# Altium PCB STM8S_RF433_RELAY_LEARN_CODE_V1.PcbDoc
Units mil, origin at the board's own origin, x right, y up, seen from the top; angles counter-clockwise.
Board outline 2490.35 x 1506.09 mil, 2 copper layers (Top Layer, Bottom Layer); 25 components, 20 nets, 83 pads, 2 vias.
Unrouted connection lines stored in the file: 2.
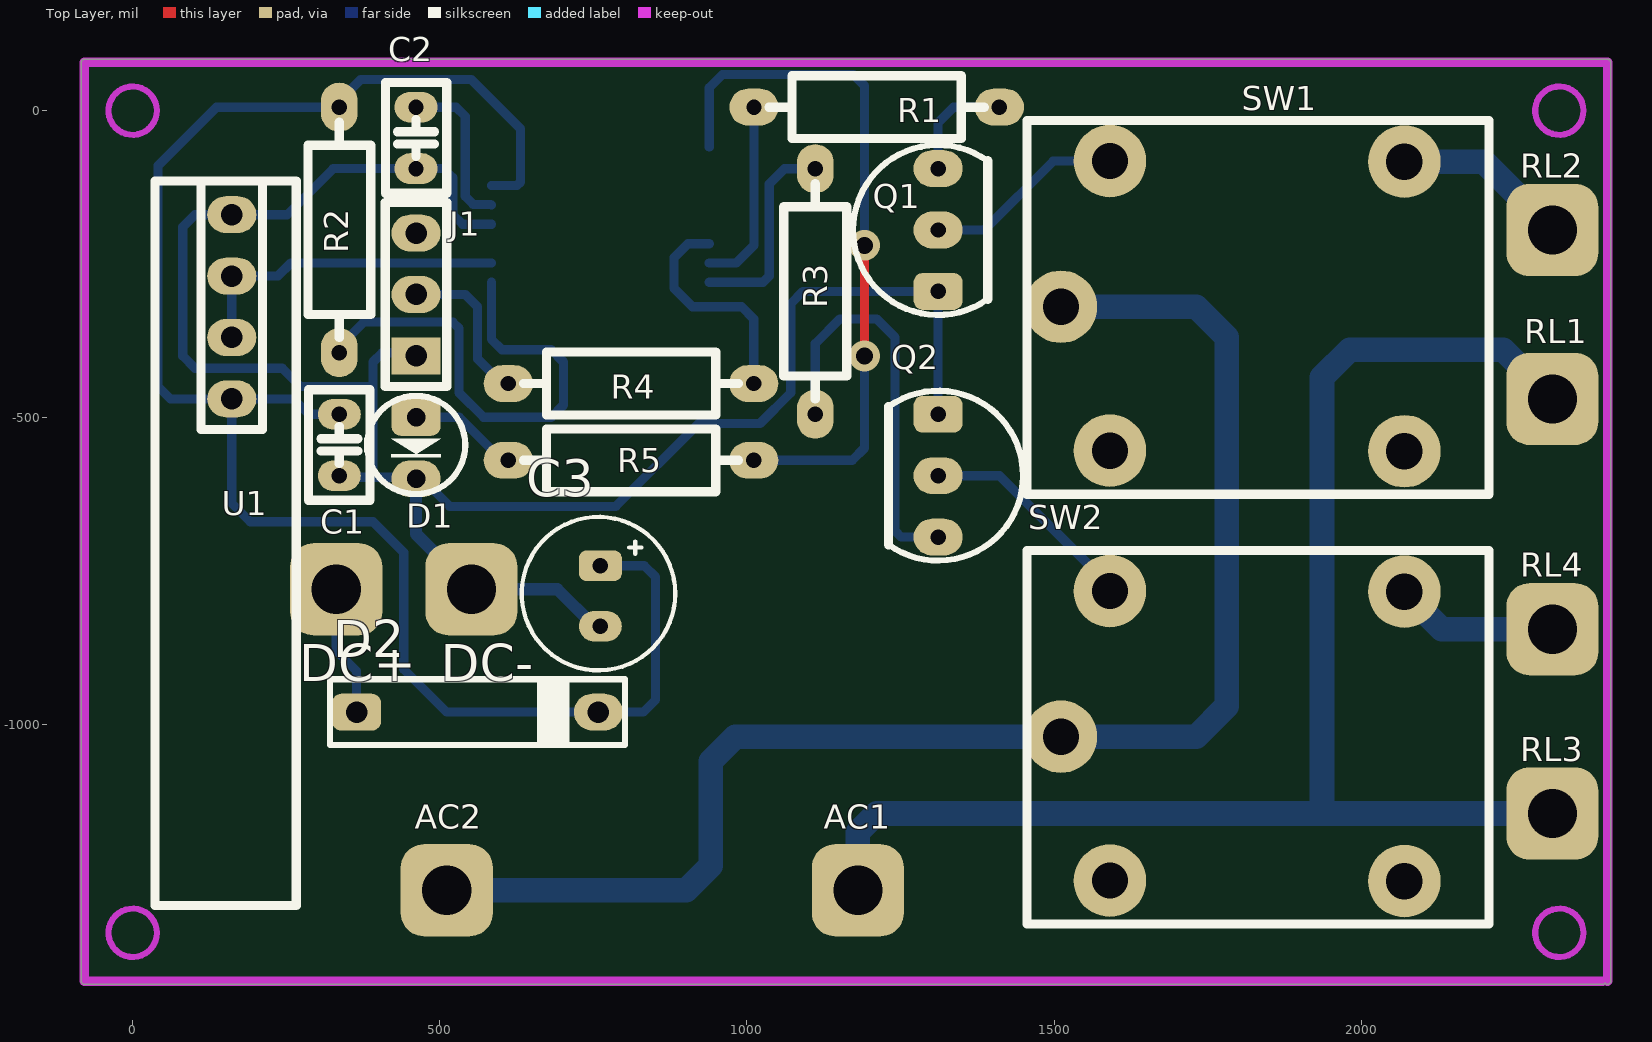
[diagram p0: Top Layer view]
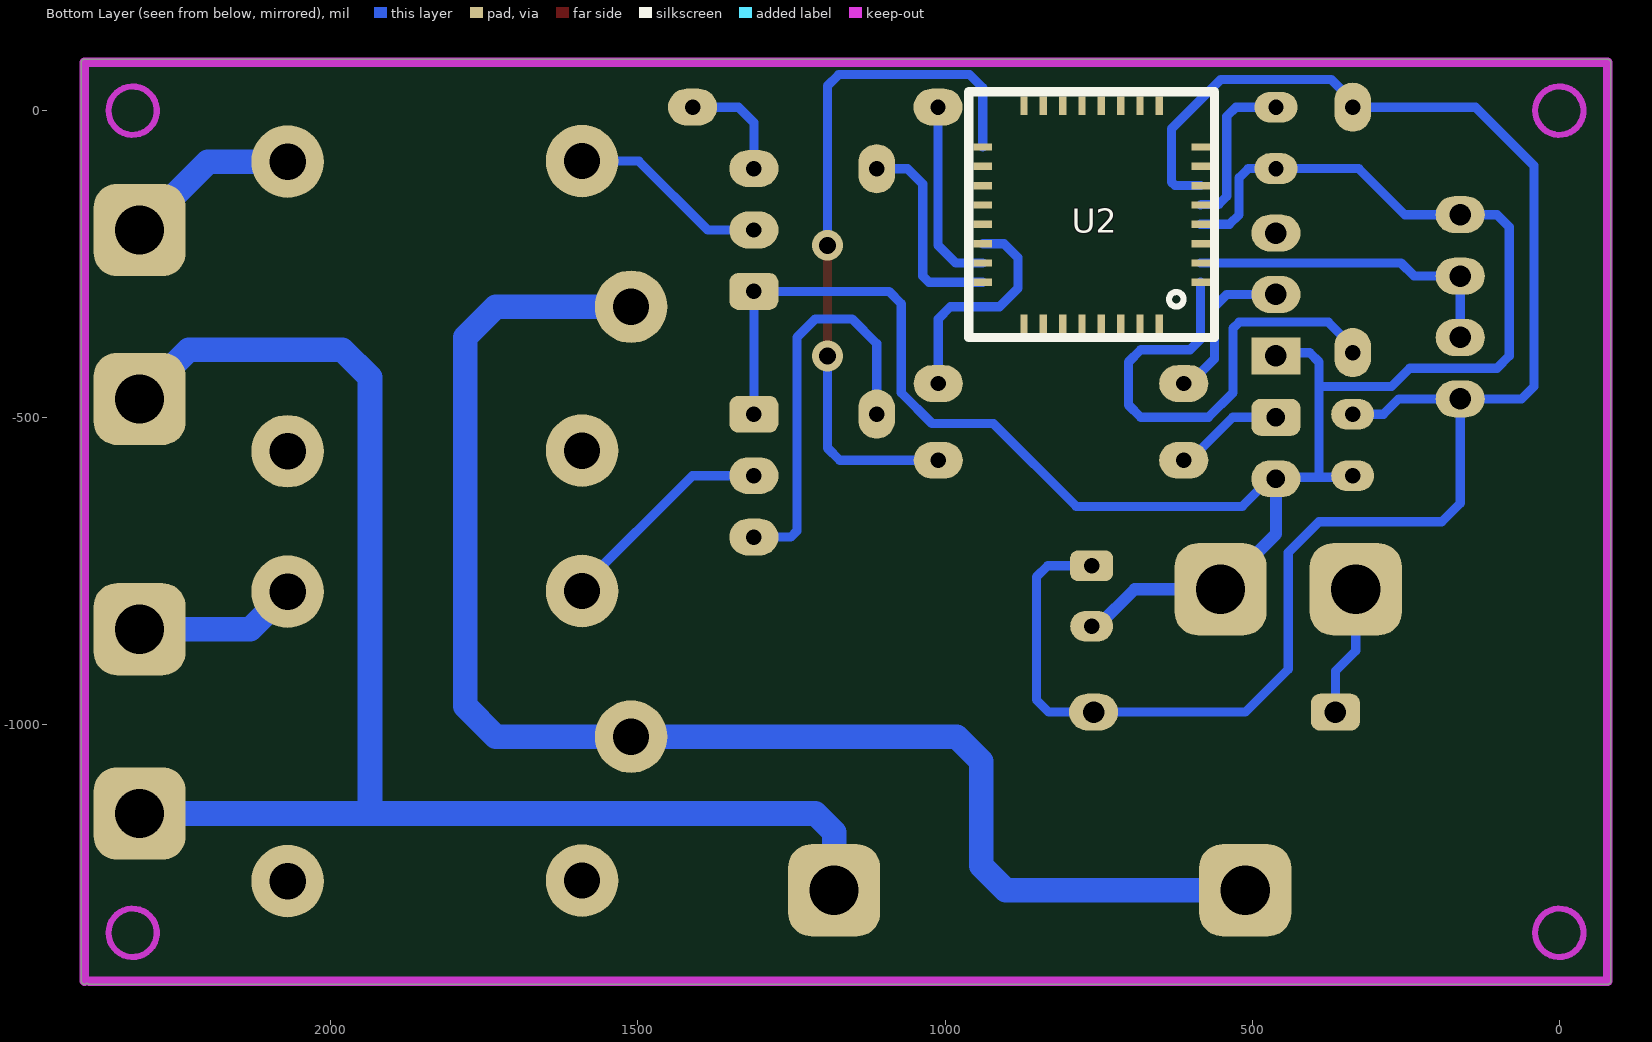
[diagram p1: Bottom Layer view, seen from below]

## Layer stack, top to bottom
Top Solder: solder mask 0.4, Solder Resist, Dk 3.5
Top Layer: signal copper 1.4
Dielectric 1: dielectric 12.6, FR-4, Dk 4.8
Bottom Layer: signal copper 1.4
Bottom Solder: solder mask 0.4, Solder Resist, Dk 3.5

## Board outline
-83.92,-1417.49 ccw(c-78.91,-1417.49) -78.91,-1422.5 2393.22,-1422.5 ccw(c2393.22,-1417.49) 2397.24,-1420.49 ccw(c2401.25,-1417.49) 2404.88,-1420.95 ccw(c2401.41,-1417.33) 2406.42,-1417.33 2406.42,78.57 ccw(c2401.41,78.57) 2400.43,83.49 ccw(c2399.44,78.57) 2399.44,83.59 -78.91,83.59 ccw(c-78.91,78.57) -83.92,78.57

## Design rules (kind name [scope] priority, off if disabled: settings)
Clearance [All] p1: gap=3.94 ignorepadtopadclearanceinfootprint=FALSE
PolygonConnect [All] p1: connectstyle=Relief reliefconductorwidth=10 reliefentries=4 polygonreliefangle="90 Angle" airgapwidth=10
RoutingVias [All] p1: holewidth=28 width=50 viastyle="Through Hole" minholewidth=28 minwidth=50 maxholewidth=28 maxwidth=50
SolderMaskExpansion [All] p1: expansion=4 istentingtop=FALSE
Width [All] p1: maxlimit=50 minlimit=10 preferedwidth=20
30 further rules are at their usual default settings.

## Components (designator, comment, footprint, x,y, rotation, side; value= is the part's Value field where it differs from the comment)
AC1 "SolderPoint" SolderPoint 1180.54,-1269.46 r0 top
AC2 "SolderPoint" SolderPoint 511.25,-1269.46 r0 top
C1 "100pF" CAP_Ceramic_Disc_2 336.25,-544.46 r270 top
C2 "100pF" CAP_Ceramic_Disc_2 461.25,-44.46 r90 top
C3 "100uF" CAP_RAD_2.5mm 758.3,-786.5 r270 top
D1 "LED" LED_3MM_GREEN 461.25,-544.46 r270 top
D2 "1N4937" DO-41 561.25,-979.46 r0 top
DC+ "SolderPoint" SolderPoint 331.25,-779.46 r0 top
DC- "SolderPoint" SolderPoint 551.25,-779.46 r0 top
J1 "UPDATE_CODE" "Header 3x1 TH Pitch 2.54mm" 461.25,-299.46 r90 top
Q1 "2SC1815" TO-92 1311.25,-194.46 r90 top
Q2 "2SC1815" TO-92 1311.25,-594.46 r270 top
R1 "10k" RES-0.25W-H-MF 1211.25,5.54 r0 top
R2 "10k" RES-0.25W-H-MF 336.25,-194.26 r90 top
R3 "10k" RES-0.25W-H-MF 1111.25,-294.46 r270 top
R4 "10k" RES-0.25W-H-MF 811.25,-444.46 r180 top
R5 "10k" RES-0.25W-H-MF 811.25,-569.46 r0 top
RL1 "AC" SolderPoint 2311.25,-469.46 r270 top
RL2 "AC" SolderPoint 2311.25,-194.46 r270 top
RL3 "AC" SolderPoint 2311.25,-1144.46 r0 top
RL4 "AC" SolderPoint 2311.25,-844.46 r0 top
SW1 "RELAY_10A" RELAY_10A_5PIN 1836.06,-314.54 r0 top
SW2 "RELAY_10A" RELAY_10A_5PIN 1836.06,-1014.54 r0 top
U1 "RF433_315_RECEVICE" RF433_315_RECEVICE 161.25,-669.46 r90 top
U2 "STM8S103K3T6" LQFP032_FPT-32P-M21 761.25,-169.46 r0 bottom

## Footprints (in the part's own frame and the unit in brackets; to place one, negate y for a bottom-side part, rotate by r counter-clockwise, add the part's x,y. Pads: shape width x height; smd on the part's side, far side on the other; paste and mask are expansions set on the pad)
CAP_Ceramic_Disc_2 [mil]
  oval 50x70 hole 25: 1(-50,0) 2(50,0)
  silkscreen extent -90,-50 90,50, body extent -92,-49 92,49, height 289
CAP_RAD_2.5mm [mm]
  rrect50% 1.27x1.778 hole 0.635: 1(-1.155,0.075)
  oval 1.27x1.778 hole 0.635: 2(1.345,0.075)
  silkscreen extent -3.17,-3.17 3.17,3.17, body extent -3.07,-3.07 3.23,3.23, height 11.02
DO-41 [mil]
  rrect50% 80x60 hole 35: 1(-196.85,0)
  oval 80x60 hole 35: 2(196.85,0)
  silkscreen extent -240,-54 240,54, body extent -214,-54 214,54, height 132
"Header 3x1 TH Pitch 2.54mm" [mil]
  rect 60x80 hole 35: 1(-100,0)
  oval 60x80 hole 35: 2(0,0) 3(100,0)
  silkscreen extent -150,-50 150,50, body extent -150,-50 150,50, height 350
LED_3MM_GREEN [mil]
  rrect50% 60x80 hole 30: 1(-45,0)
  oval 60x80 hole 30: 2(55,0)
  silkscreen extent -80,-80 80,80, body extent -70,-75 65,75, height 223
LQFP032_FPT-32P-M21 [mil]
  rect 30x12 smd: 1(-177.32,110.24) 2(-177.32,78.74) 3(-177.32,47.24) 4(-177.32,15.75) 5(-177.32,-15.75) 6(-177.32,-47.24) 7(-177.32,-78.74) 8(-177.32,-110.24) 17(177.32,-110.24) 18(177.32,-78.74) 19(177.32,-47.24) 20(177.32,-15.75) 21(177.32,15.75) 22(177.32,47.24) 23(177.32,78.74) 24(177.32,110.24)
  rect 12x30 smd: 9(-110.24,-177.32) 10(-78.74,-177.32) 11(-47.24,-177.32) 12(-15.75,-177.32) 13(15.75,-177.32) 14(47.24,-177.32) 15(78.74,-177.32) 16(110.24,-177.32) 25(110.24,177.32) 26(78.74,177.32) 27(47.24,177.32) 28(15.75,177.32) 29(-15.75,177.32) 30(-47.24,177.32) 31(-78.74,177.32) 32(-110.24,177.32)
  silkscreen extent -200,-200 200,200, body extent -177,-177 177,177, height 59
RELAY_10A_5PIN [mm]
  round 3 hole 1.5: 1(-6.225,5.9) 2(-8.25,-0.125) 3(-6.225,-6.075) 4(5.95,-6.1) 5(5.95,5.875)
  silkscreen extent -9.65,-7.88 9.45,7.57, body extent -9.65,-7.88 9.45,7.62, height 15.3
RES-0.25W-H-MF [mil]
  oval 80x60 hole 25: 1(-199.8,0) 2(199.8,0.01)
  silkscreen extent -175,-51 175,51, body extent -211,-51 211,51, height 106
RF433_315_RECEVICE [mil]
  oval 60x80 hole 35: 1(200,0) 2(300,0) 3(400,0) 4(500,0)
  silkscreen extent -625,-105 555,125, body extent -626,-105 555,167, height 472
SolderPoint [mil]
  rrect50% 150x150 hole 80: 1(0,0)
TO-92 [mil]
  rrect50% 60x80 hole 25: 1(-100,0)
  oval 60x80 hole 25: 2(0,0) 3(100,0)
  silkscreen extent -138,-81 138,138, body extent -109,-48 109,93, height 298

## Part data
C1 C2: library part Capacitors(Disc)
C3: library part Capacitor(Radian)
D1: library part "LED 3MM"
J1: library part "Header 3x1 TH Pitch 2.54mm"
Q1 Q2: library part "2SC1815 (TO-92)"
R1 R2 R3 R4 R5: library part "Resistors THD"
RL1 RL2 RL3 RL4: library part SolderPoint
U1: library part RF433_315

## Via types
v1: diameter 50, hole 28, Top Layer to Bottom Layer, 2 vias

## Nets (pads, with @x,y where several pads share a name; then routed paths per layer and width w, separated by ;. In a path a pad name is that pad's centre, name@x,y a point inside that pad or via, vN(x,y) a via of type N, cw(c..) or ccw(c..) an arc to the next point about the centre after c; other vN are vias at no path point)
GND: C1.2 C2.1 C3.2 D1.2 DC-.1 J1.1 Q1.1 Q2.1 U1.4 U2.4 | length 3347.6
  Bottom Layer w15: C1.2 338.75,-596.96 386.25,-596.96 ; J1.1@461.25,-394.46 406.25,-394.46 391.25,-409.46 391.25,-449.06 ; U2.4 537,-185.2 521.25,-169.46 521.25,-109.46 506.25,-94.46 C2.1 326.25,-94.46 251.25,-169.46 U1.4 101.25,-169.46 81.25,-189.46 81.25,-399.46 101.25,-419.46 243.28,-419.46 272.89,-449.06 391.25,-449.06 ; Q2.1 Q1.1 1091.25,-294.46 1071.25,-314.46 1071.25,-459.46 1021.25,-509.46 921.25,-509.46 786.25,-644.46 516.25,-644.46 471.25,-599.46 D1.2 458.75,-596.96 386.25,-596.96 ; 386.25,-596.96 391.25,-591.96 391.25,-449.06
  Bottom Layer w20: D1.2 461.25,-689.46 DC-.1 ; DC-.1@585.74,-813.94 DC-.1 ; C3.2 751.25,-839.46 691.25,-779.46 DC-.1
NetAC1_1: AC1.1 RL1.1 RL3.1 | length 2374.5
  Bottom Layer w40: AC1.1 1180.54,-1175.17 1211.25,-1144.46 1936.25,-1144.46 ; RL3.1 1936.25,-1144.46 ; RL1.1 2231.25,-389.46 1981.25,-389.46 1936.25,-434.46 1936.25,-494.46 1936.25,-529.46 1936.25,-1144.46
NetAC2_1: AC2.1 SW1.2 SW2.2 | length 2384.6
  Bottom Layer w40: AC2.1 901.25,-1269.46 941.25,-1229.46 941.25,-1059.46 981.25,-1019.46 SW2.2 1731.25,-1019.46 1781.25,-969.46 1781.25,-369.46 1731.25,-319.46 SW1.2
NetC2_2: C2.2 U2.5 | length 264.8
  Bottom Layer w15: C2.2 526.25,5.54 541.25,-9.46 541.25,-139.46 554.5,-152.71 582.93,-152.71 U2.5
NetD1_1: D1.1 R5.1 | length 179.2
  Bottom Layer w15: D1.1 531.45,-499.46 601.45,-569.46 R5.1
NetD2_1: D2.1 DC+.1 | length 213.7
  Bottom Layer w15: DC+.1 331.25,-879.46 364.4,-912.61 D2.1
NetJ1_2: J1.2 R4.2 | length 259.9
  Bottom Layer w15: J1.2 541.25,-299.46 561.25,-319.46 561.25,-404.27 601.45,-444.46 R4.2
NetQ1_2: Q1.2 SW1.1 | length 326.2
  Bottom Layer w15: Q1.2 1386.25,-194.46 1498.46,-82.25 SW1.1
NetQ1_3: Q1.3 R1.2 | length 185.2
  Bottom Layer w15: Q1.3 1311.25,-19.46 1336.26,5.55 R1.2
NetQ2_2: Q2.2 SW2.1 | length 362.2
  Bottom Layer w15: Q2.2 1411.25,-594.46 1590.98,-774.18 SW2.1
NetQ2_3: Q2.3 R3.2 | length 662.9
  Bottom Layer w15: R3.2 1111.26,-379.45 1151.25,-339.46 1211.25,-339.46 1241.25,-369.46 1241.25,-684.46 1251.25,-694.46 Q2.3
NetR1_1: R1.1 U2.23 | length 309.7
  Bottom Layer w15: U2.23 982.51,-248.2 1011.45,-219.26 R1.1
NetR2_1: R2.1 U2.1 | length 820.6
  Bottom Layer w15: R2.1 336.25,-384.06 375.86,-344.46 521.25,-344.46 531.25,-354.46 531.25,-459.46 571.25,-499.46 681.25,-499.46 701.25,-479.46 701.25,-409.46 681.25,-389.46 601.25,-389.46 583.93,-372.13 U2.1
NetR3_1: R3.1 U2.24 | length 337.2
  Bottom Layer w15: U2.24 1026.02,-279.69 1036.25,-269.46 1036.25,-119.46 1061.06,-94.65 R3.1
NetR4_1: R4.1 U2.22 | length 372.4
  Bottom Layer w15: U2.22 904.01,-216.7 881.25,-239.46 881.25,-289.46 911.25,-319.46 991.25,-319.46 1011.06,-339.26 R4.1
NetR5_2: R5.2 U2.17 | length 1143.9
  Top Layer w15: v1(1191.25,-399.46) v1(1191.25,-219.46)
  Bottom Layer w15: U2.17 938.57,37.12 960.03,58.57 1173.22,58.57 1191.25,40.54 v1(1191.25,-219.46) ; R5.2 1171.26,-569.45 1191.25,-549.46 v1(1191.25,-399.46)
NetRL2_1: RL2.1 SW1.5 | length 287
  Bottom Layer w40: SW1.5 2200.03,-83.24 RL2.1
NetRL4_1: RL4.1 SW2.5 | length 266.3
  Bottom Layer w40: SW2.5 2131.53,-844.46 RL4.1
NetU1_2: U1.2 U1.3 U2.2 | length 531.5
  Bottom Layer w15: U1.2 U1.3 236.25,-269.46 257.51,-248.2 U2.2
VCC: C1.1 C3.1 D2.2 R2.2 SW1.3 SW2.3 U1.1 U2.6 | length 2915.3
  Bottom Layer w15: C1.1 286.25,-494.46 261.25,-469.46 U1.1 ; U2.6 625.39,-122.21 631.25,-116.35 631.25,-29.46 551.25,50.54 371.25,50.54 336.25,15.54 R2.2 136.25,5.54 41.25,-89.46 41.25,-449.46 61.25,-469.46 U1.1 ; C3.1 832.83,-741.03 851.25,-759.46 851.25,-959.46 831.25,-979.46 D2.2 511.25,-979.46 441.25,-909.46 441.25,-719.46 391.25,-669.46 191.25,-669.46 161.25,-639.46 U1.1
pads on no net: J1.3 SW1.4 SW2.4 U2.3 U2.7 U2.8 U2.9 U2.10 U2.11 U2.12 U2.13 U2.14 U2.15 U2.16 U2.18 U2.19 U2.20 U2.21 U2.25 U2.26 U2.27 U2.28 U2.29 U2.30 U2.31 U2.32

## Keep-outs
Keep-Out Layer:
  circle w10: c2322.67,-0.17 r39.37
  circle w10: c-0.17,-1338.75 r39.37
  circle w10: c2322.67,-1338.75 r39.37
  circle w10: c-0.17,-0.17 r39.37
  lines w15: 2393.22,-1417.49 -78.91,-1417.49 -78.91,78.57 2399.44,78.57 ; 2401.25,-1417.49 2401.25,-1409.46 2401.41,-1409.46 ; 2401.41,-1417.33 2401.41,78.57